# EAGLE board LegoConnectorX1B (EAGLE 9.0.1)
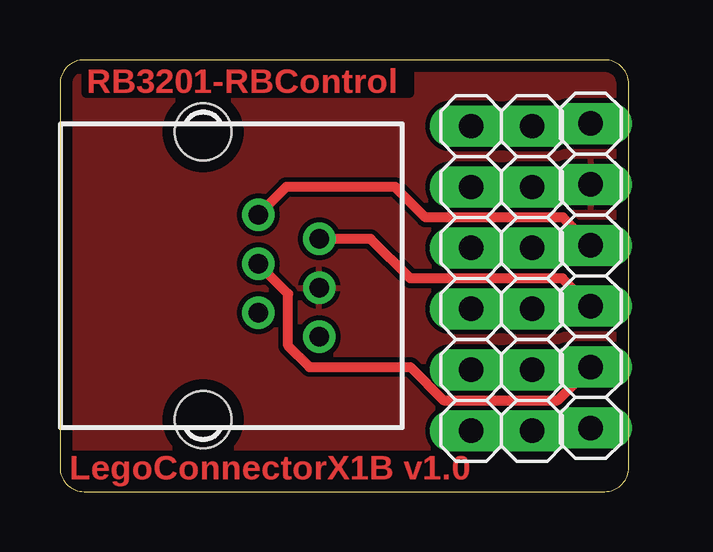
[diagram p0: board, top side]
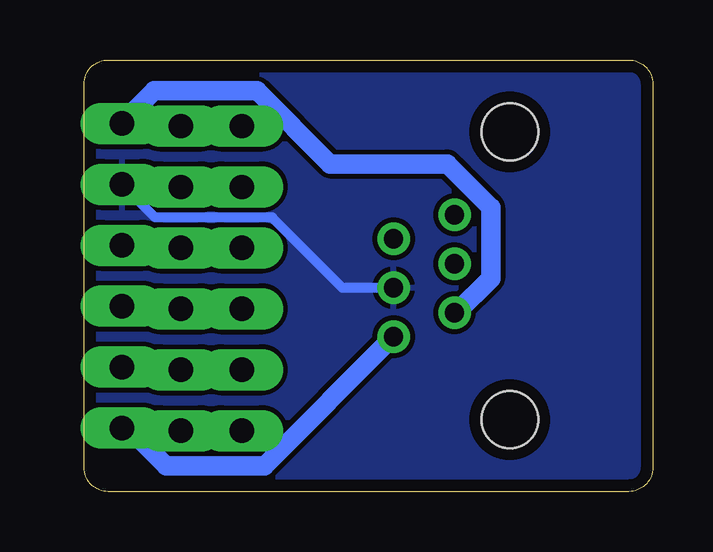
[diagram p1: board, bottom side, seen from below]

Size 23.71 x 18 mm. Coordinates in mm from the lower left corner, seen from the top.
Outline: 0,17 0,1 arc90 1,0 22.71,0 arc90 23.71,1 23.71,17 arc90 22.71,18 1,18 arc90 0,17
Copper layers (1*16): Top 0.035mm / dielectric 1.5mm / Bottom 0.035mm
Design rules "robotikabrno": minimum track width 0.2mm, minimum drill 0.35mm, track to track 0.2mm, track to pad 0.2mm, pad to pad 0.2mm, via to via 0.2mm, smd to smd 0.2mm, copper to edge 0.5mm, drill to drill 0.5mm, minimum pad ring 0.16mm, minimum via ring 0.16mm, stop-mask expansion 0.1mm, vias tented up to drill 0.4mm, thermal gap 0.2mm
Net classes: 0 default: width 0.2 mm, drill 0.35 mm, clearance 0.2 mm

## Footprints (pad centres in the part's own frame; a part is rotated, then mirrored left to right if it is on the bottom)
1X06 = drill 1.016 long: 1 -6.35,0; 2 -3.81,0; 3 -1.27,0; 4 1.27,0; 5 3.81,0; 6 6.35,0
NXT-SOCKET = drill 0.8 pad 1.3: 1 2.54,10.809; 2 1.54,8.269; 3 0.5,10.809; 4 -0.5,8.269; 5 -1.54,10.809; 6 -2.54,8.269 | hole 2.36: -6,5.969; 6,5.969

## Placement (x,y rotation side)
JP1  M1  [1X06]  22.13,9 90 top
JP2  M2  [1X06]  17.14,8.89 90 top
JP3  M2  [1X06]  19.68,8.89 90 top
X1  NXT-SOCKET  [NXT-SOCKET]  0,9 270 top

## Library data of the parts
JP1-JP3 = pinhead
X1 = NXT Compatible (female) Sockets - Mindsensors; OC_FARNELL: unknown; OC_NEWARK: unknown

## Nets
+5V: JP1.2 X1.4
GND: JP1.5 X1.3
M1A: JP1.1 X1.1
M1B: JP1.6 X1.2
N$1: JP2.1 JP3.1
N$2: JP2.2 JP3.2
N$3: JP2.3 JP3.3
N$4: JP2.4 JP3.4
N$5: JP2.5 JP3.5
N$6: JP2.6 JP3.6
TACHO_1A: JP1.3 X1.5
TACHO_1B: JP1.4 X1.6

## Tracks (layer width: path | path; a pad name or v marks a point on that pad's centre or on a via)
+5V
  Top 0.406: JP1.2 20.75,3.81 15.98,3.81 14.61,5.19 10.4,5.19 9.52,6.07 9.52,8.25 X1.4
GND
  Bottom 0.406: X1.3 12.95,8.5 15.88,11.43 20.75,11.43 JP1.5
  pour Top: 0,0 24.11,0 24.11,18.48 0,18.48
  pour Bottom: 0,0 24.11,0 24.11,18.48 0,18.48
M1A
  Bottom 0.813: JP1.1 21.87,2.65 20.29,1.07 16.2,1.07 X1.1
M1B
  Bottom 0.813: JP1.6 22.16,15.35 20.8,16.71 16.51,16.71 13.46,13.66 8.57,13.66 6.75,11.84 6.75,8.89 8.18,7.46 X1.2
N$1
  Bottom 1.27: JP3.1 JP2.1
N$2
  Bottom 1.27: JP3.2 JP2.2
N$3
  Bottom 1.27: JP3.3 JP2.3
N$4
  Bottom 1.27: JP3.4 JP2.4
N$5
  Bottom 1.27: JP3.5 JP2.5
N$6
  Bottom 1.27: JP3.6 JP2.6
TACHO_1A
  Top 0.406: JP1.3 22.11,7.73 20.95,8.89 14.61,8.89 12.96,10.54 X1.5
TACHO_1B
  Top 0.406: JP1.4 20.97,11.43 15.24,11.43 13.97,12.7 9.43,12.7 X1.6

## Text on the board
Top: RB3201-RBControl | LegoConnectorX1B v1.0
tDocu: RB3201-RBControl | MB | - | EB | EA | + | MA | LegoConnectorX1B v1.0